# Altium PCB OCB.PcbDoc
Units mil, origin at the board's own origin, x right, y up, seen from the top; angles counter-clockwise.
Board outline 2252.44 x 1567.16 mil, 4 copper layers (Top Layer, Int1 (GND), Int2 (PWR), Bottom Layer), stack 53.912 mil thick; 35 components, 25 nets, 156 pads, 23 vias.
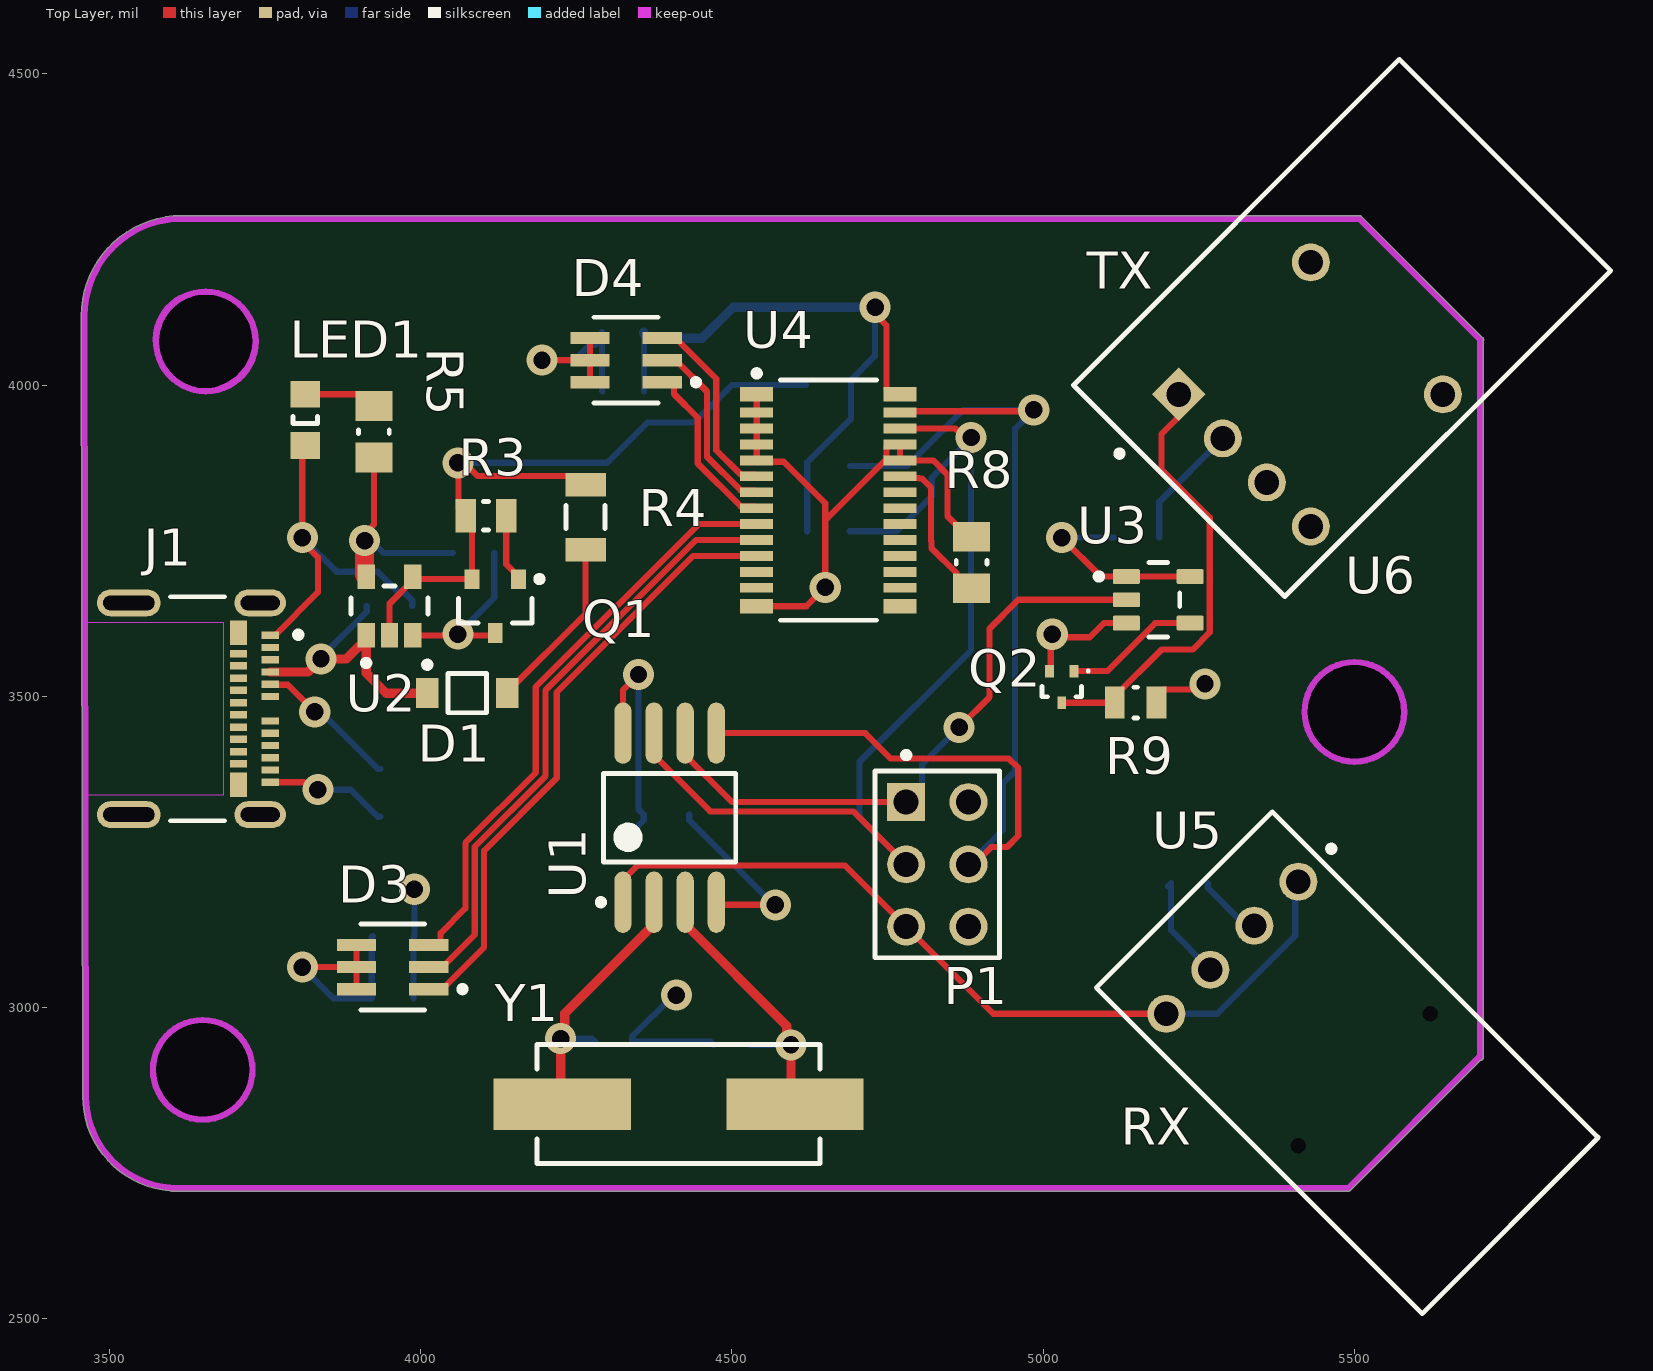
[diagram p0: Top Layer view]
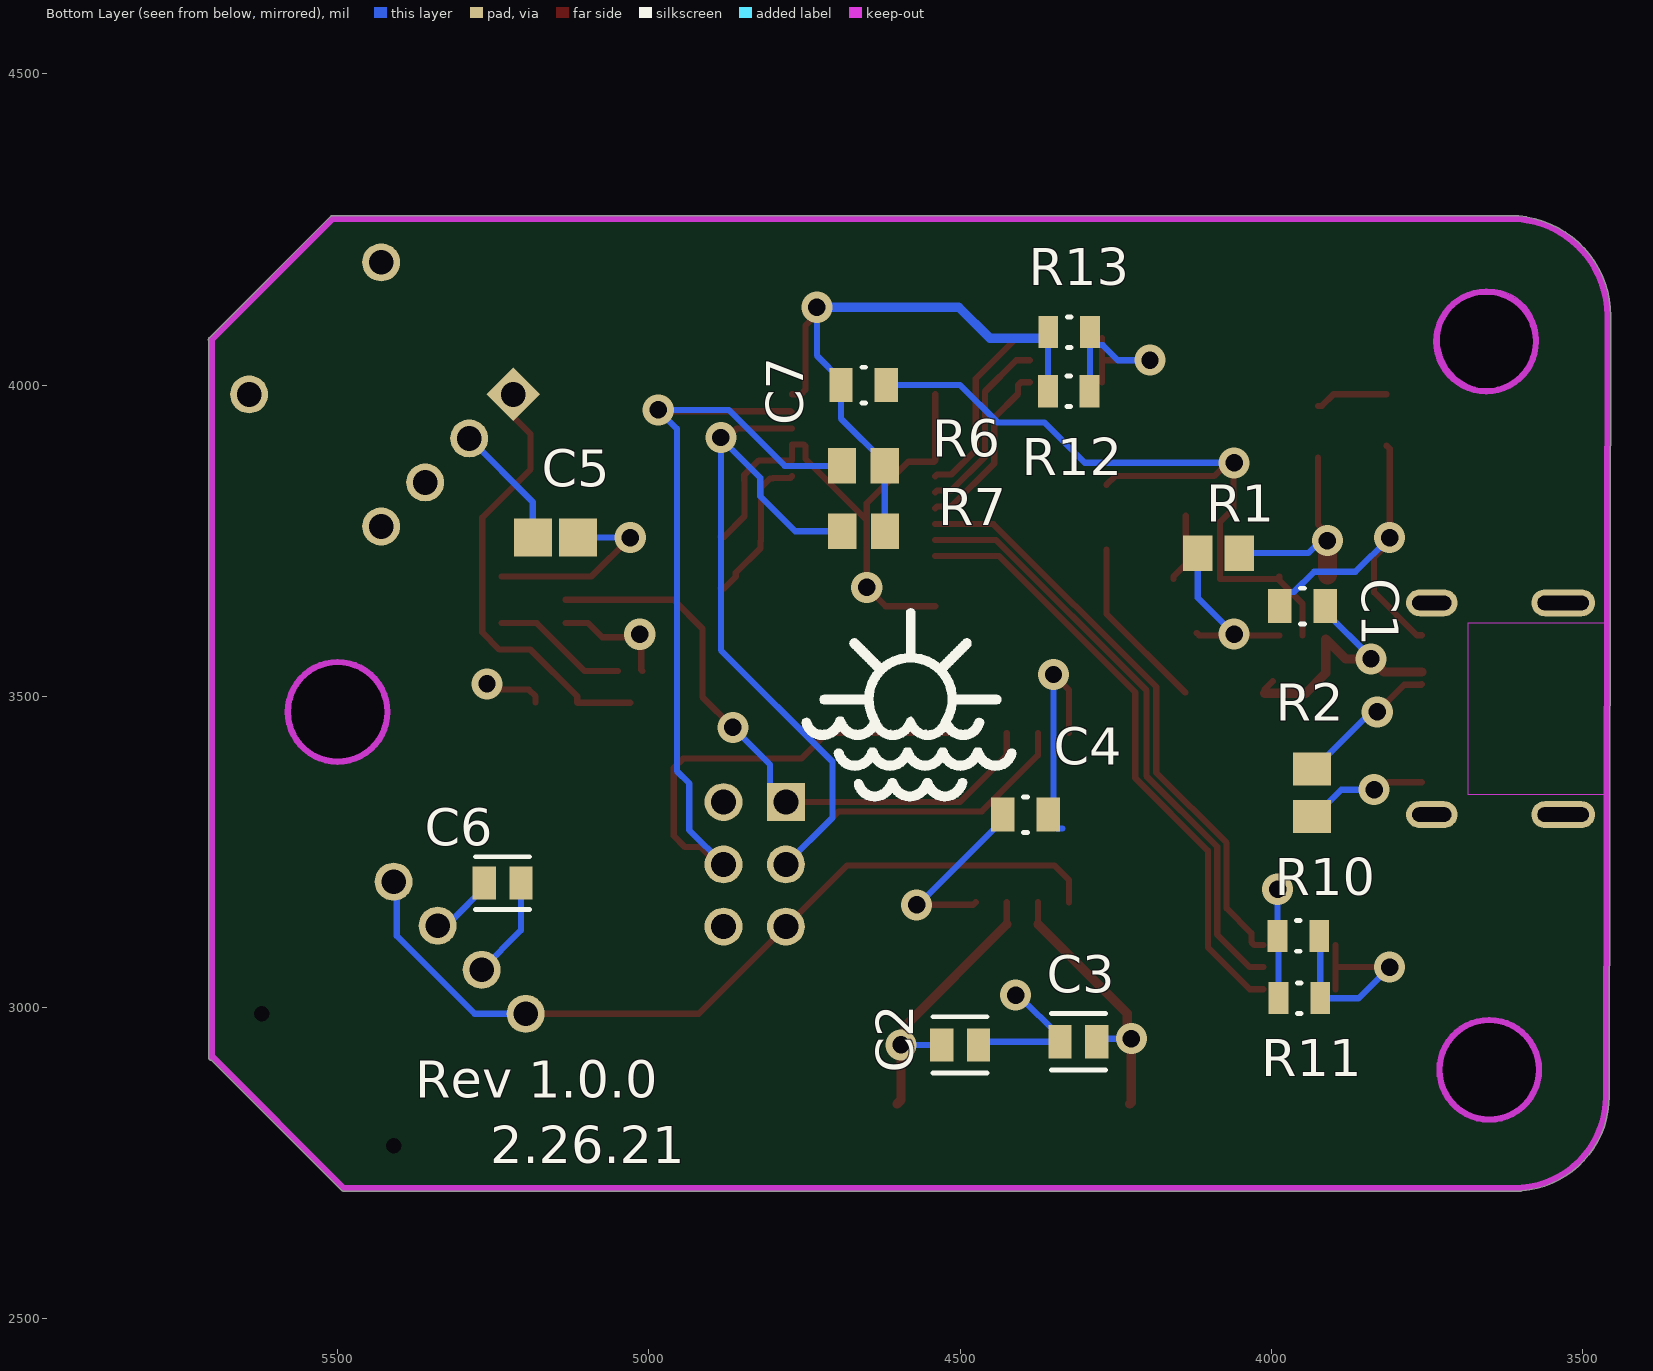
[diagram p1: Bottom Layer view, seen from below]
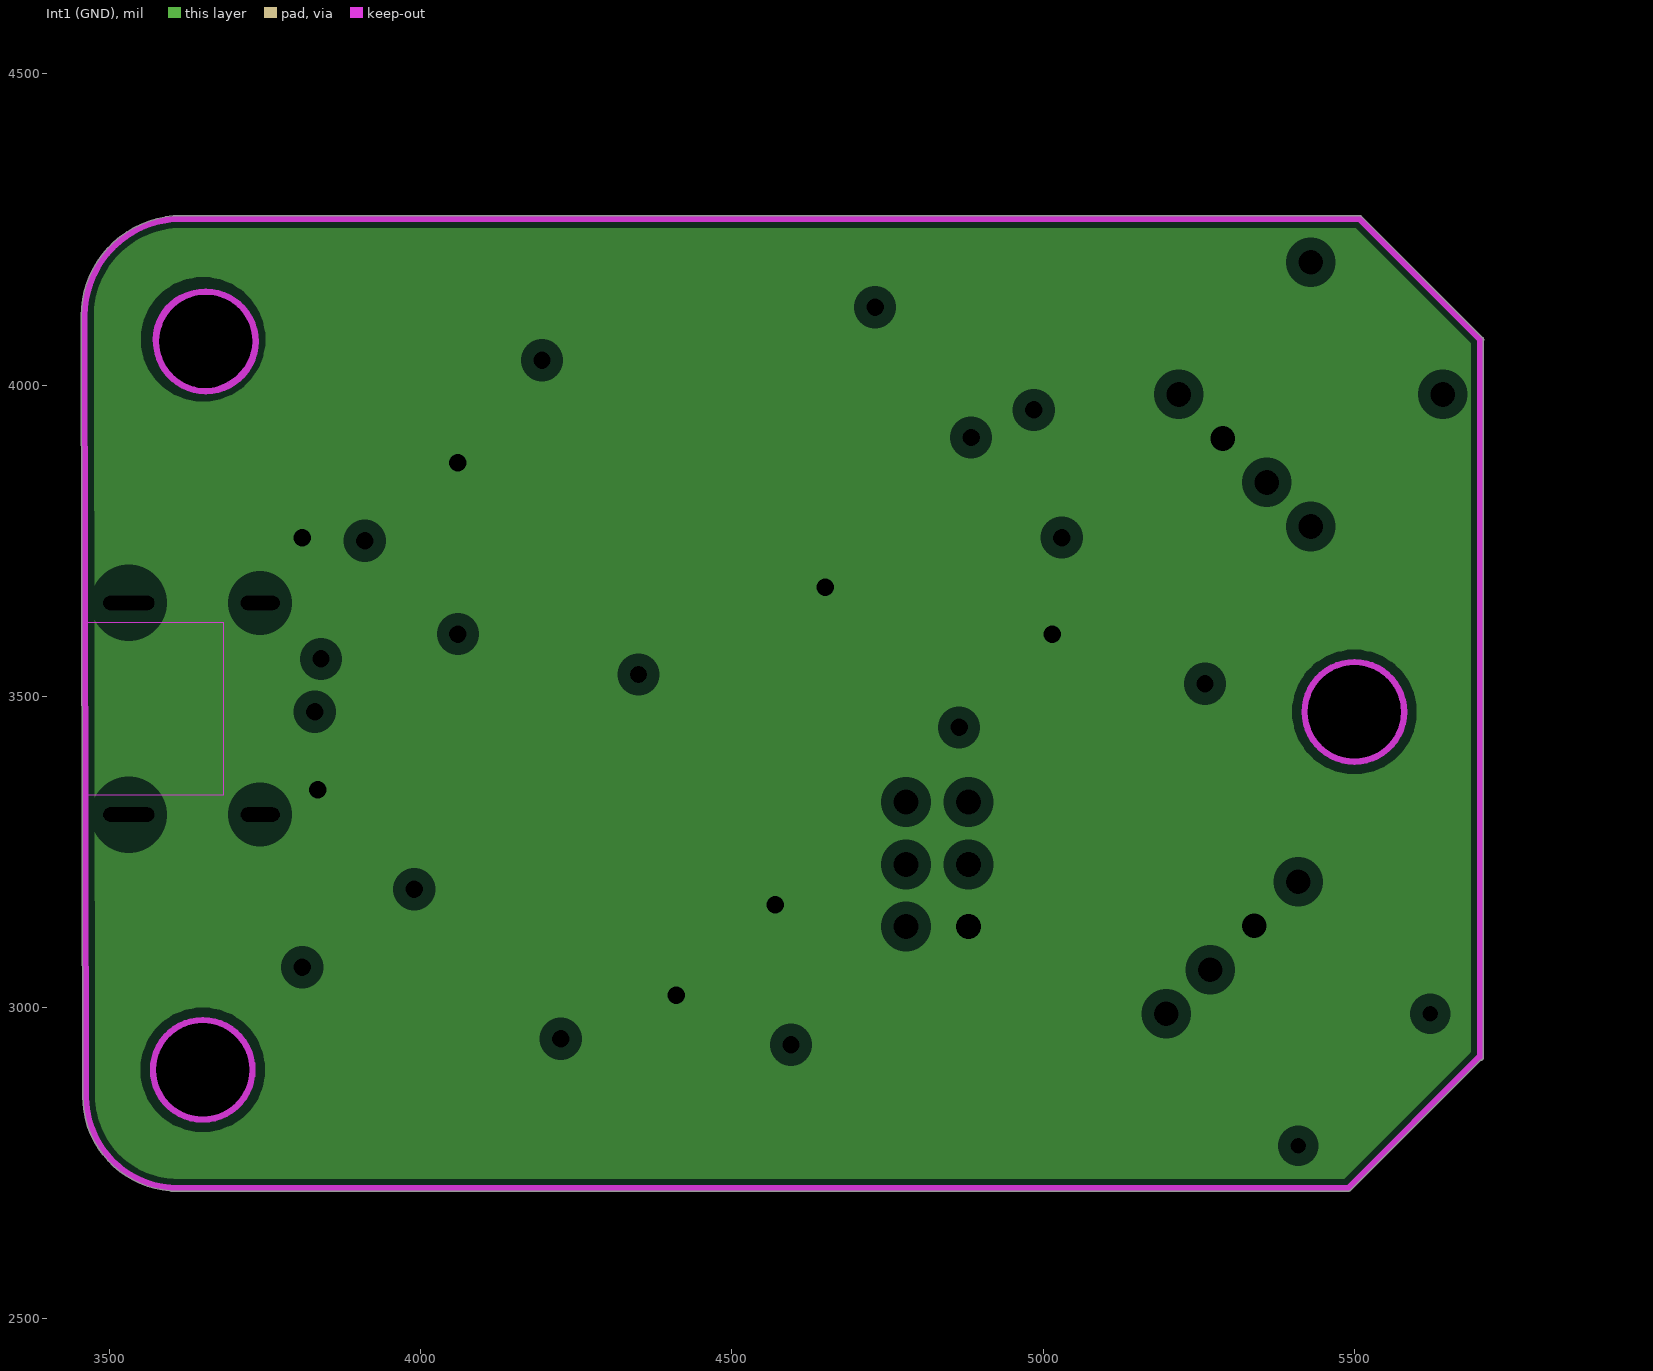
[diagram p2: Int1 (GND), clearances drawn from the general rule]
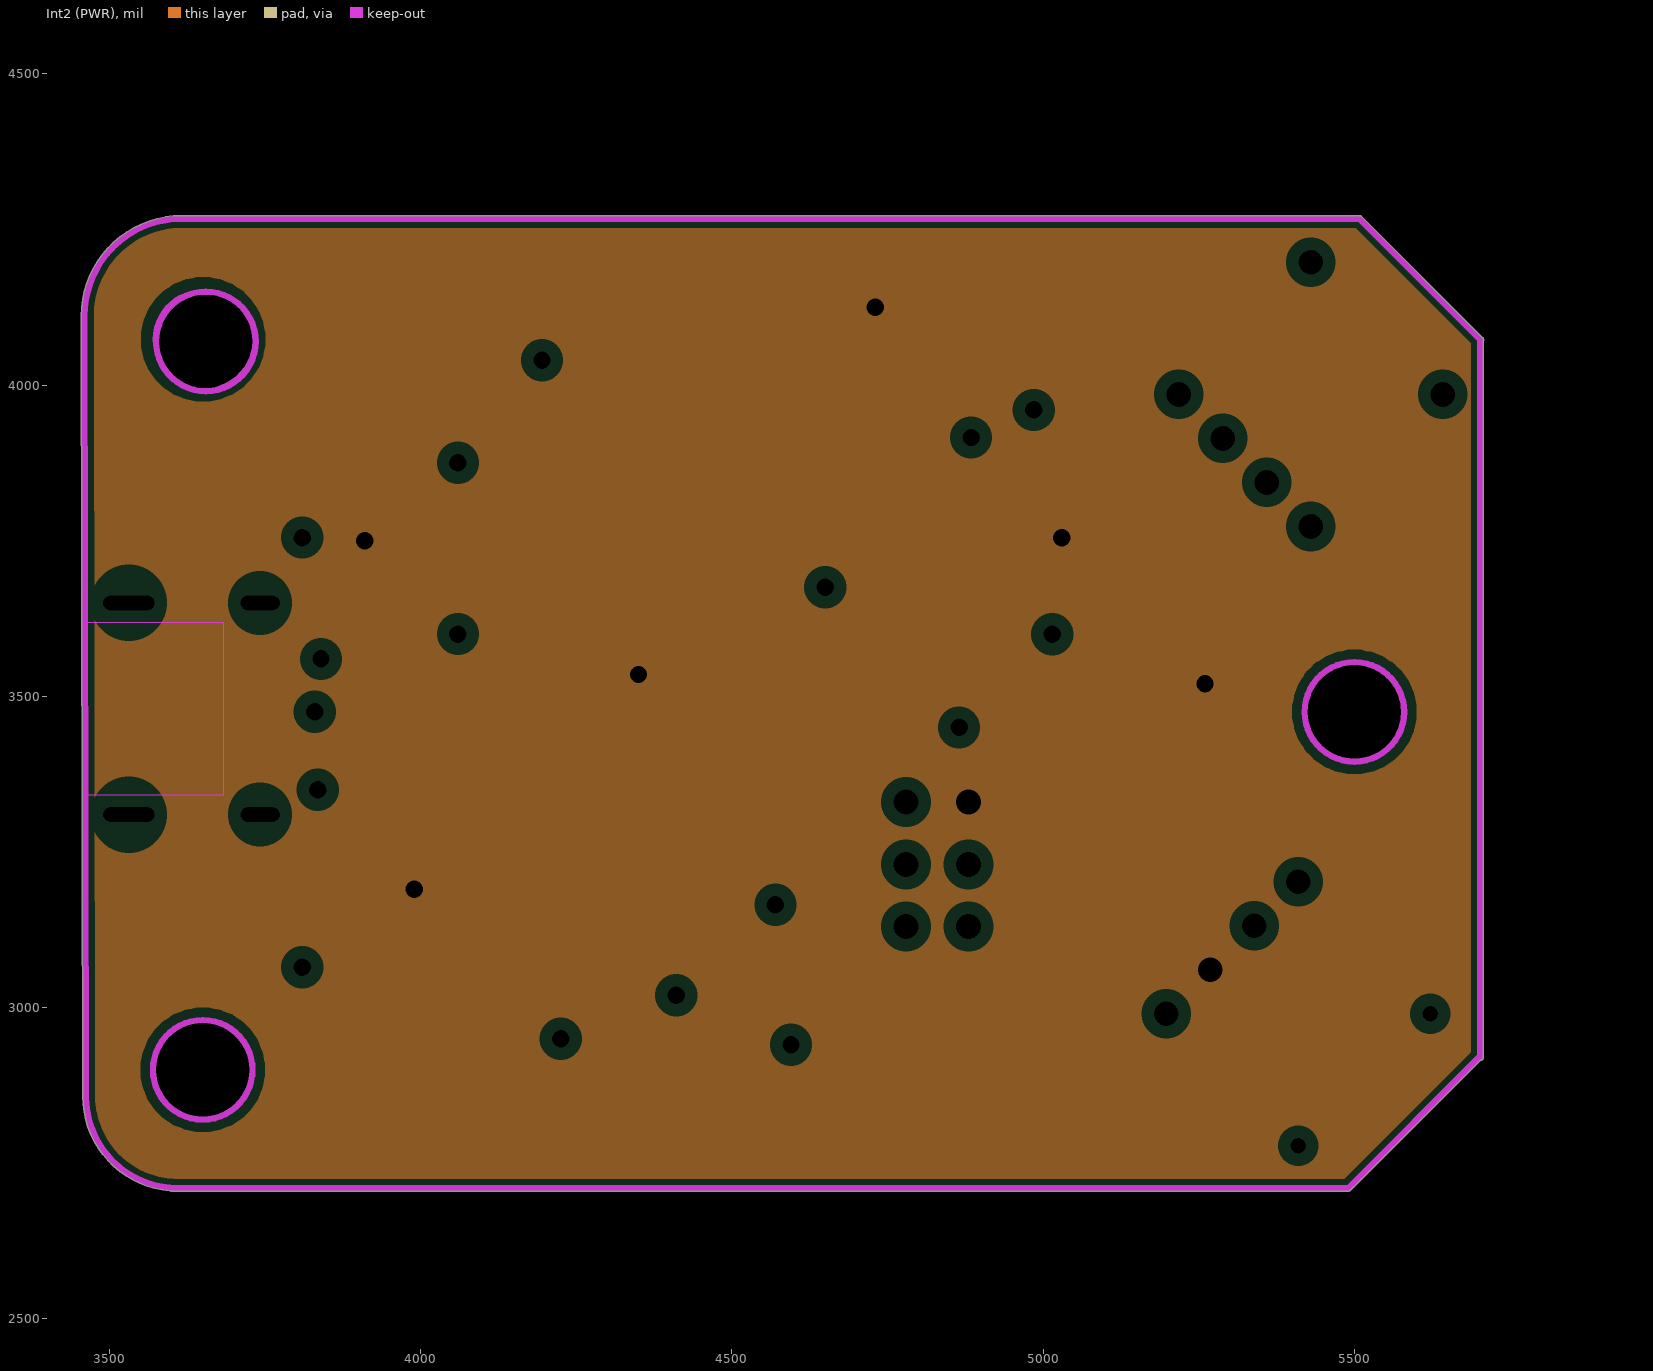
[diagram p3: Int2 (PWR), clearances drawn from the general rule]
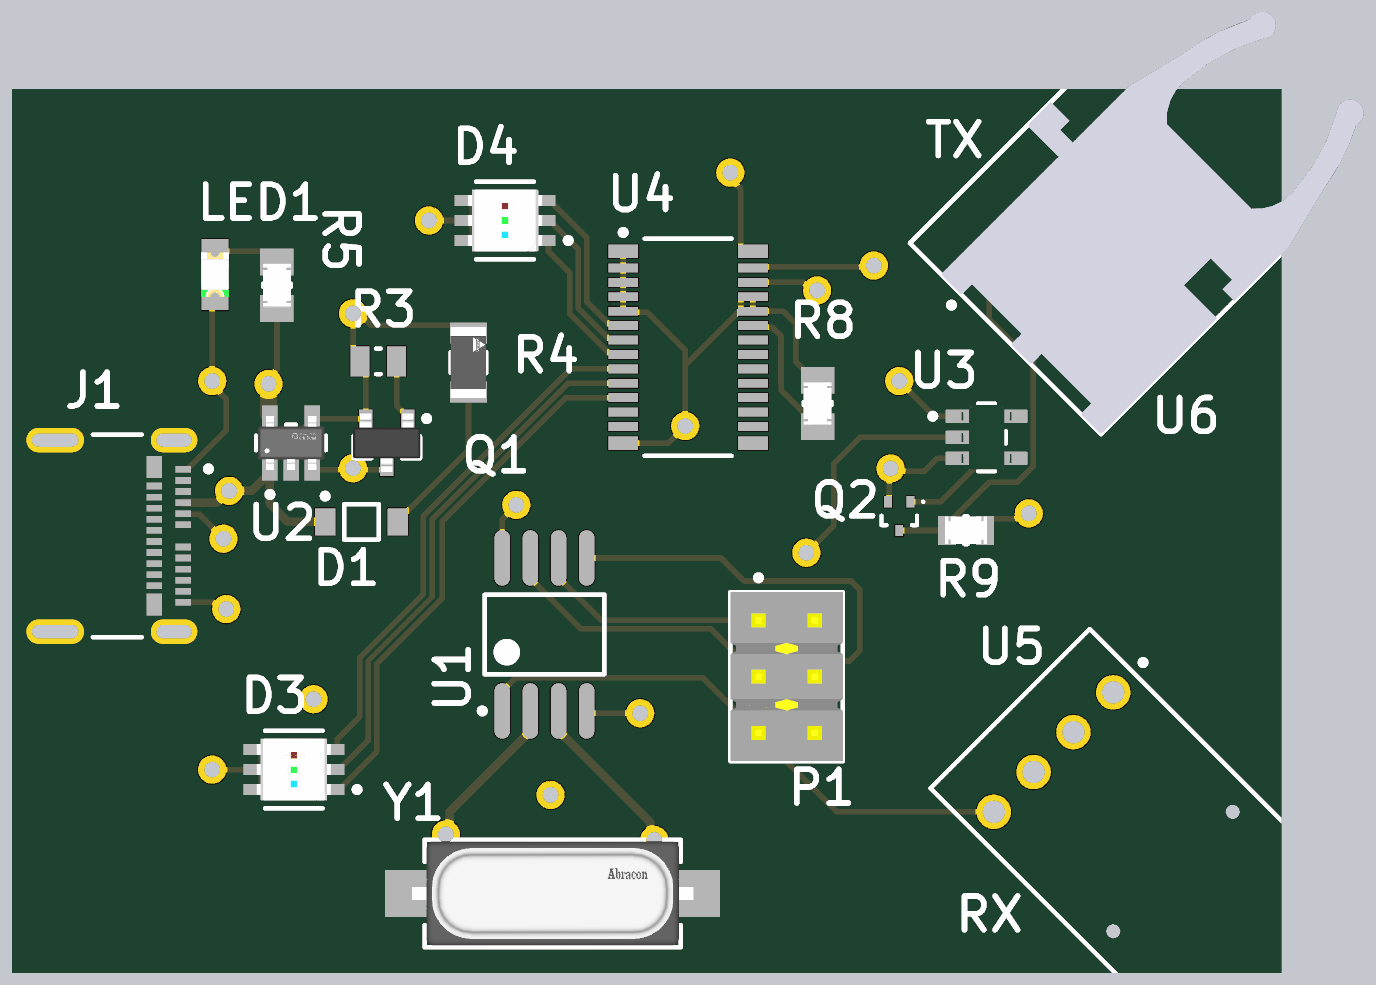
[diagram p4: 3D render of the assembled board from above, using the file's embedded part models]
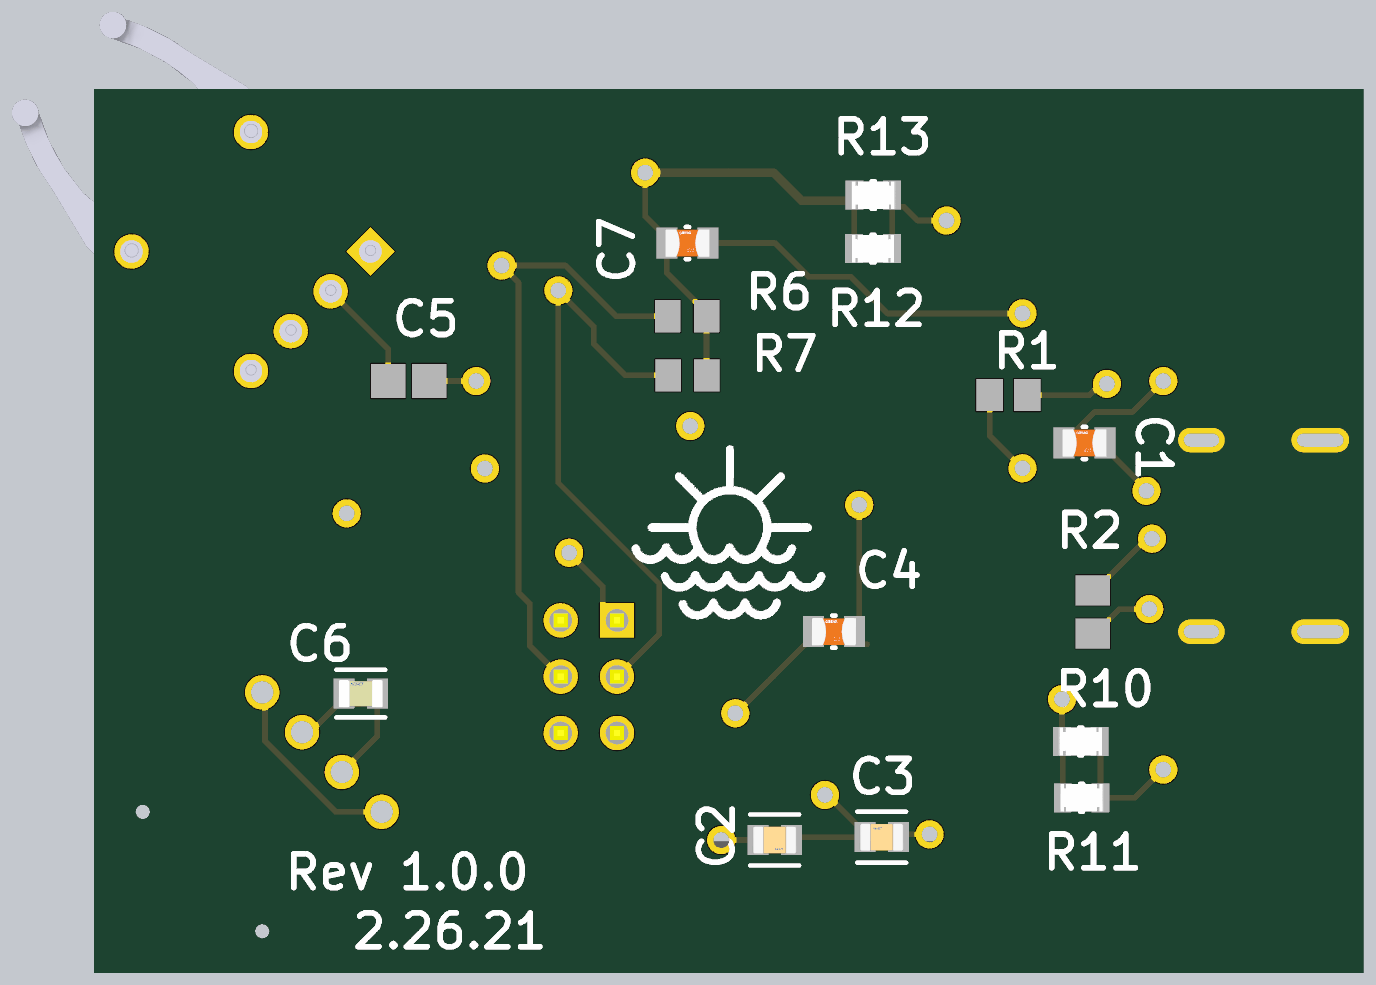
[diagram p5: 3D render of the assembled board from below, using the file's embedded part models]

## Layer stack, top to bottom
Top Solder: solder mask 1, SM-001, Dk 4
Top Layer: signal copper 1.378
Dielectric 1: prepreg 5.1, PP-017, Dk 4.3
Dielectric 2: prepreg 5.1, PP-017, Dk 4.3
Int1 (GND): plane copper 1.378, net GND
Dielectric 3: core 28, Core-039, Dk 4.8
Int2 (PWR): plane copper 1.378, net 3V3
Dielectric 4: prepreg 5.1, PP-017, Dk 4.3
Dielectric 5: prepreg 5.1, PP-017, Dk 4.3
Bottom Layer: signal copper 1.378
Bottom Solder: solder mask 1, SM-001, Dk 4

## Board outline
3597.85,2705.47 ccw(c3600,2710) 3600,2704.99 3610.04,2704.99 5490,2704.99 ccw(c5490,2710) 5493.56,2706.47 5493.55,2706.45 5702.08,2914.99 ccw(c5702.13,2920) 5707.15,2920 5707.15,4070.61 ccw(c5702.5,4072.5) 5707.52,4072.5 ccw(c5702.5,4072.5) 5706.05,4076.05 5511.41,4270.68 5511.43,4270.66 ccw(c5507.87,4267.13) 5507.87,4272.15 5490,4272.15 3616.07,4272.15 ccw(c3616.07,4111.15) 3455.07,4111.15 ccw(c3460.09,4111.15) 3455.07,4111.14 3457.29,2857.68 cw(c3610,2857.69) 3457.29,2857.69 3457.29,2857.68 ccw(c3610,2857.69)
cut-out: 3650.61,3993.46 cw(c3650.61,4073.46) 3570.61,4073.46 cw(c3650.61,4073.46) 3650.61,4153.46 cw(c3650.61,4073.46) 3730.61,4073.46 cw(c3650.61,4073.46)
cut-out: 3570,2900 cw(c3650,2900) 3650,2980 cw(c3650,2900) 3730,2900 cw(c3650,2900) 3650,2820 cw(c3650,2900)
cut-out: 5420,3475 ccw(c5500,3475) 5500,3395 ccw(c5500,3475) 5580,3475 ccw(c5500,3475) 5500,3555 ccw(c5500,3475)

## Design rules (kind name [scope] priority, off if disabled: settings)
Clearance [All] p1: gap=5 ignorepadtopadclearanceinfootprint=FALSE
MinimumSolderMaskSliver [All] p1: minsoldermaskwidth=2
PlaneClearance [All] p1: clearance=20
PlaneConnect [All] p1: planeconnectstyle=Relief reliefexpansion=20 reliefentries=4 reliefconductorwidth=10 reliefairgap=10
PolygonConnect [All] p1: connectstyle=Relief reliefconductorwidth=10 reliefentries=4 polygonreliefangle="90 Angle" airgapwidth=10
RoutingVias [All] p1: holewidth=28 width=50 viastyle="Through Hole" minholewidth=28 minwidth=50 maxholewidth=28 maxwidth=50
SilkToSilkClearance [All] p1: silktosilkclearance=5
SilkToSolderMaskClearance [IsPad] p1: minsilkscreentomaskgap=5 clearancetoexposedcopper=TRUE
SolderMaskExpansion [All] p1: expansion=2 istentingtop=FALSE
UnRoutedNet [All] p1: checkbadconnections=TRUE
Width [All] p1: maxlimit=35 minlimit=10 preferedwidth=10
24 further rules are at their usual default settings.

## Components (designator, comment, footprint, x,y, rotation, side; value= is the part's Value field where it differs from the comment)
C1 "CC0805KRX7R7BB104" FP-CC0805-0_85-MFG 3950,3645 r0 bottom value="100 nF"
C2 "CBR08C240FAGAC" FP-CBR08C-MFG 4500,2940 r0 bottom value="24 pF"
C3 "CBR08C240FAGAC" FP-CBR08C-MFG 4310,2945 r180 bottom value="24 pF"
C4 "CC0805KRX7R7BB104" FP-CC0805-0_85-MFG 4395,3310 r0 bottom value="100 nF"
C5 "08055A4R7CAT2A" CAPC2013X71X50ML20T25 5150,3755 r180 bottom
C6 "C0805C109C5GACTU" FP-C0805C-DN-MFG 5235,3200 r180 bottom value="1.0 pF"
C7 "CC0805KRX7R7BB104" FP-CC0805-0_85-MFG 4655,4000 r0 bottom value="100 nF"
D1 "MMSZ5233BT1G" ONSC-SOD-123-2-425-04_V 4075,3505 r0 top
D3 "ASMT-YTD7-0AA02" FP-PLCC-6-MFG 3955,3065 r180 top
D4 "ASMT-YTD7-0AA02" FP-PLCC-6-MFG 4330,4040 r180 top
J1 "1054500101" FP-1054500101-MFG 3610,3480 r270 top
LED1 "150080SS75000" 0805_A 3815,3943.86 r90 top
P1 "TSW-103-07-G-D" SMTC-TSW-103-07-G-D_V 4830,3230 r270 top
Q1 "2N7002-T1-E3" VISH-TO-236-3_A_L 4120,3645 r270 top
Q2 "MMBT3904TT1G" ONSC-SC-75-3-463-01_V 5030,3515 r270 top
R1 "ERA6AEB332V" RESC2013X60X40NL20T25 4085,3730 r180 bottom
R2 "ERJ6ENF1202V" RESC2013X70X40ML20T20 3935,3345 r270 bottom
R3 "CRCW0805100RFKEA" RESC2013X50X30LL20T20 4105,3790 r0 top
R4 "CRCW1206200RFKEA" FP-CRCW1206-e3-IPC_C 4265,3787.79 r90 top
R5 "CRCW08056K80FKEA" FP-CRCW0805-e3-IPC_A 3925,3925 r270 top
R6 "ERJ-6ENF4701V" RESC2013X70X40NL20T20 4655.55,3870 r180 bottom
R7 "ERJ-6ENF4701V" RESC2013X70X40NL20T20 4655,3765 r180 bottom
R8 "CRCW08056K80FKEA" FP-CRCW0805-e3-IPC_A 4885,3715 r270 top
R9 "CRCW0805160RFKEA" FP-CRCW0805-e3-IPC_C 5148.5,3490 r0 top
R10 "CRCW080510K0JNEA" FP-CRCW0805-e3-IPC_C 3956.5,3115 r0 bottom
R11 "CRCW080510K0JNEA" FP-CRCW0805-e3-IPC_C 3955,3015 r0 bottom
R12 "CRCW080510K0JNEA" FP-CRCW0805-e3-IPC_C 4325.47,3990 r0 bottom
R13 "CRCW080510K0JNEA" FP-CRCW0805-e3-IPC_C 4325,4085 r0 bottom
U1 "ATtiny85-20SU" 8S2_M 4400,3305 r90 top
U2 "NCP114ASN330T1G" FP-483-MFG 3950,3645 r90 top
U3 "SN74LVC1G00DBVR" FP-DBV0005A-MFG 5185,3655 r0 top
U4 "PCA9685PW/Q900,118" SOT361-1_V 4655,3815 r0 top
U5 "HFBR-2521Z" BCM-HFBR-2521Z-4 5410,2990 r45 top
U6 "HFBR-1522Z" AVAG-HFBR-15X2Z_V 5430,3985 r135 top
Y1 "ABLS-16.000MHZ-K4T" FP-ABLS-MFG 4414.53,2845 r0 top

## Footprints (in the part's own frame and the unit in brackets; to place one, negate y for a bottom-side part, rotate by r counter-clockwise, add the part's x,y. Pads: shape width x height; smd on the part's side, far side on the other; paste and mask are expansions set on the pad)
8S2_M [mm] "SOP, 8-Leads, Body 5.3x5.3mm, Pitch 1.27mm, IPC Low Density"
  oval 2.5x0.7 smd: 1(-3.45,1.905) 2(-3.45,0.635) 3(-3.45,-0.635) 4(-3.45,-1.905) 5(3.45,-1.905) 6(3.45,-0.635) 7(3.45,0.635) 8(3.45,1.905)
  silkscreen extent -3.57,-2.7 1.8,2.93, body extent -2.7,-2.68 2.7,2.68, height 2.16
0805_A [mm] "Chip LED, 2-Leads, Body 2.0x1.3mm, IPC Medium Density"
  rect 1.1x1.2 smd: 1(-1.05,0) 2(1.05,0)
  silkscreen extent -0.15,-0.5 0.15,0.5, body extent -1,-0.62 1,0.63, height 0.68
AVAG-HFBR-15X2Z_V [mm] "THD, 6-Leads, Body 18.8x12.19mm, Pitch 2.54mm"
  rect 1.55x1.55 hole 1.01: 1(3.81,3.81)
  round 1.55 hole 1.01: 2(1.27,3.81) 3(-1.27,3.81) 4(-3.81,3.81) 5(-3.81,-3.81) 8(3.81,-3.81)
  silkscreen extent -5.08,-12.22 7.11,7.35, body extent -5.08,-12.22 7.12,6.58, height 7.6
BCM-HFBR-2521Z-4 [mm] "Horizontal Package, 4-Leads, Body 18.8 x 10.16, Height 7.62 mm"
  round 1.55 hole 1.01: 1(3.81,3.81) 2(1.27,3.81) 3(-1.27,3.81) 4(-3.81,3.81)
  round 0 hole 0.64 unplated: 5(-3.81,-3.81) 8(3.81,-3.81)
  silkscreen extent -5.08,-12.22 5.83,6.58, body extent -5.08,-12.22 5.08,6.58, height 7.62
CAPC2013X71X50ML20T25 [mm] "Chip Capacitor, 2-Leads, Body 2.01x1.25mm, IPC Low Density"
  rect 1.55x1.55 smd: 1(-0.925,0) 2(0.925,0)
  body extent -1.1,-0.72 1.11,0.72, height 0.71
FP-483-MFG [mm]
  rect 1x0.7 smd paste+0 mask+0: 1(-1.2,0.95) 2(-1.2,0) 3(-1.2,-0.95) 4(1.2,-0.95) 5(1.2,0.95)
  silkscreen extent -2.45,-1.58 0.82,1.58, body extent -1.8,-1.83 1.8,1.83, height 0.25
FP-1054500101-MFG [mm]
  rrect100% 1.1x2.1 hole 1.6 slot 0.6 at 0 deg paste-1000 mask+0: 1(-4.32,3.36) 2(4.32,3.36)
  rrect100% 1.1x2.6 hole 2.1 slot 0.6 at 0 deg paste-1000 mask+0: 3(-4.32,-2) 4(4.32,-2)
  rect 0.3x0.7 smd paste+0 mask+0: A1(-3,3.77) A2(-2.5,3.77) A3(-2,3.77) A4(-1.5,3.77) A5(-1,3.77) A6(-0.5,3.77) A7(0.5,3.77) A8(1,3.77) A9(1.5,3.77) A10(2,3.77) A11(2.5,3.77) A12(3,3.77) B2(2.25,2.47) B3(1.75,2.47) B4(1.25,2.47) B5(0.75,2.47) B6(0.25,2.47) B7(-0.25,2.47) B8(-0.75,2.47) B9(-1.25,2.47) B10(-1.75,2.47) B11(-2.25,2.47)
  rect 1x0.7 smd paste+0 mask+0: B1(3.1,2.47) B12(-3.1,2.47)
  Keep-Out Layer region: -3.5,-3.77 3.5,-3.77 3.5,1.88 -3.5,1.88
  silkscreen extent -4.57,-0.3 4.57,5.04
FP-ABLS-MFG [mm]
  rect 5.6x2.1 smd paste+0 mask+0: 1(-4.75,0) 2(4.75,0)
  silkscreen extent -5.77,-2.42 5.77,2.42, body extent -7.65,-2.52 7.65,2.52, height 0.25
FP-C0805C-DN-MFG [mm]
  rect 0.95x1.35 smd paste+0 mask+0: 1(-0.75,0) 2(0.75,0)
  silkscreen extent -1.1,-1.07 1.1,1.07, body extent -1,-0.63 1,0.62, height 0.88
FP-CBR08C-MFG [mm]
  rect 0.95x1.35 smd paste+0 mask+0: 1(-0.75,0) 2(0.75,0)
  silkscreen extent -1.1,-1.15 1.1,1.15, body extent -1,-0.63 1,0.62, height 0.95
FP-CC0805-0_85-MFG [mm]
  rect 0.95x1.4 smd paste+0 mask+0: 1(-0.925,0) 2(0.925,0)
  silkscreen extent -0.08,-0.72 0.08,0.72, body extent -1,-0.63 1,0.63, height 0.95
FP-CRCW0805-e3-IPC_A [mil]
  rect 47.5x59.38 smd paste+0 mask+0: 1(-41.37,0) 2(41.37,0)
  silkscreen extent -3,-25 3,25, body extent -85,-49 85,49, height 10
FP-CRCW0805-e3-IPC_C [mil]
  rect 31.75x51.5 smd paste+0 mask+0: 1(-33.5,0) 2(33.5,0)
  silkscreen extent -3,-25 3,25, body extent -53,-31 53,31, height 10
FP-CRCW1206-e3-IPC_C [mil]
  rect 37.64x65.28 smd paste+0 mask+0: 1(-52.21,0) 2(52.21,0)
  silkscreen extent -19,-31 19,31, body extent -75,-38 75,38, height 10
FP-DBV0005A-MFG [mm]
  rrect17% 1.1x0.6 smd paste+0 mask+0: 1(-1.3,0.95) 2(-1.3,0) 3(-1.3,-0.95) 4(1.3,-0.95) 5(1.3,0.95)
  silkscreen extent -2.55,-1.53 0.87,1.52, body extent -1.95,-1.78 1.95,1.78, height 0.25
FP-PLCC-6-MFG [mm]
  rect 1.6x0.5 smd paste+0 mask+0: 1(-1.475,0.9) 2(-1.475,0) 3(-1.475,-0.9) 4(1.475,-0.9) 5(1.475,0) 6(1.475,0.9)
  silkscreen extent -2.98,-1.75 1.3,1.75, body extent -2.37,-1.6 2.37,1.6, height 0.25
ONSC-SC-75-3-463-01_V [mil] "SOT23, 3-Leads, Body 1.6x0.8mm, Pitch 0.5mm"
  rect 20x14.02 smd: 1(-25.49,19.69) 2(-25.49,-19.69) 3(25.49,0)
  silkscreen extent -27,-31 16,44, body extent -16,-31 16,31, height 35
ONSC-SOD-123-2-425-04_V [mm] "SOD, 2-Leads, Body 2.69x1.6mm"
  rect 0.91x1.22 smd: 1(-1.635,0) 2(1.635,0)
  silkscreen extent -1.76,-0.8 0.78,1.28, body extent -1.35,-0.8 1.35,0.8, height 1.35
RESC2013X50X30LL20T20 [mm] "Chip Resistor, 2-Leads, Body 2.00x1.25mm, IPC High Density"
  rect 0.85x1.35 smd: 1(-0.825,0) 2(0.825,0)
  silkscreen extent -0.1,-0.58 0.1,0.58, body extent -1.1,-0.72 1.1,0.72, height 0.5
RESC2013X60X40NL20T25 [mm] "Chip Resistor, 2-Leads, Body 2.00x1.25mm, IPC Medium Density"
  rect 1.2x1.45 smd: 1(-0.85,0) 2(0.85,0)
  body extent -1.1,-0.72 1.1,0.72, height 0.6
RESC2013X70X40ML20T20 [mm] "Chip Resistor, 2-Leads, Body 2.00x1.25mm, IPC Low Density"
  rect 1.35x1.55 smd: 1(-0.975,0) 2(0.975,0)
  body extent -1.1,-0.72 1.1,0.72, height 0.7
RESC2013X70X40NL20T20 [mm] "Chip Resistor, 2-Leads, Body 2.2x1.35mm, IPC Medium Density"
  rect 1.15x1.45 smd: 1(-0.875,0) 2(0.875,0)
  body extent -1.1,-0.72 1.1,0.72, height 0.7
SMTC-TSW-103-07-G-D_V [mm] "THD, 6-Leads, Body 7.62x5.08mm, Pitch 2.54mm"
  rect 1.55x1.55 hole 1.02: 1(-2.54,-1.27)
  round 1.55 hole 1.02: 2(-2.54,1.27) 3(0,-1.27) 4(0,1.27) 5(2.54,-1.27) 6(2.54,1.27)
  silkscreen extent -4.58,-2.54 3.81,2.54, body extent -3.81,-2.54 3.81,2.54, height 8.38
SOT361-1_V [mm] "SOP, 28-Leads, Body 9.7x4.4mm, Pitch 0.65mm, NXP Recommended"
  rect 1.35x0.6 smd: 1(-2.925,4.325) 14(-2.925,-4.325) 15(2.925,-4.325) 28(2.925,4.325)
  rect 1.35x0.4 smd: 2(-2.925,3.575) 3(-2.925,2.925) 4(-2.925,2.275) 5(-2.925,1.625) 6(-2.925,0.975) 7(-2.925,0.325) 8(-2.925,-0.325) 9(-2.925,-0.975) 10(-2.925,-1.625) 11(-2.925,-2.275) 12(-2.925,-2.925) 13(-2.925,-3.575) 16(2.925,-3.575) 17(2.925,-2.925) 18(2.925,-2.275) 19(2.925,-1.625) 20(2.925,-0.975) 21(2.925,-0.325) 22(2.925,0.325) 23(2.925,0.975) 24(2.925,1.625) 25(2.925,2.275) 26(2.925,2.925) 27(2.925,3.575)
  silkscreen extent -3.05,-4.9 1.96,5.3, body extent -2.2,-4.85 2.2,4.85, height 1.1
VISH-TO-236-3_A_L [mm] "SOT-23, 3-Leads, Body 3.04x1.4mm, Pitch 0.95mm, IPC High Density"
  rect 0.8x0.6 smd: 1(-1.1,0.95) 2(-1.1,-0.95) 3(1.1,0)
  silkscreen extent -1.22,-1.5 0.7,1.93, body extent -1.32,-1.52 1.32,1.52, height 1.12

## Part data
C1 C4 C7: library part CMP-1036-04402-6, "CAP CER 0.1UF 16V X7R 0805", Capacitance="100 nF", Manufacturer=Yageo, Package=CC0805-0.85, Temperature="-30°C to +85°C", Temperature Characteristic=X7R, Temperature Range High=+85°C, Temperature Range Low=-30°C, Tolerance=0.1, Voltage Rating="16 V", Automotive=No, Category=Cap, ComponentLink2Description=Datasheet, ComponentLink2URL=http://www.yageo.com/documents/recent/UPY-GPHC_Y5V_6.3V-to-50V_8.pdf, Device Class L1="Passive Components", Device Class L2=Capacitors, Device Class L3="Ceramic Capacitors", Digikey Description="CAP CER 0.1UF 16V X7R 0805", Footprint Url=http://www.yageo.com/exep/pages/download/literatures/UPY-C_GEN_24.pdf, Height=0.95mm, Ipc Land Pattern Name=CAPC200125X85, Lead Free=Yes, Manufacturer Part Number=CC0805KRX7R7BB104, Material=Ceramic, Mouser Description="Multilayer Ceramic Capacitors MLCC - SMD/SMT 100nF 16V X7R 10%", Octopart=https://octopart.com/cc0805krx7r7bb104-yageo-39467769, RoHS=TRUE
C2 C3: library part CMP-03020-025790-1, "CAP CER 24PF 250V C0G/NP0 0805", Capacitance="24 pF", Manufacturer=KEMET, Package=CBR08C, Temperature="-55°C to +125°C", Temperature Characteristic=C0G, Temperature Coefficient=30ppm/°C, Temperature Range High=+125°C, Temperature Range Low=-55°C, Tolerance=0.01, Voltage Rating="250 V", Automotive=No, Category=Cap, ComponentLink2Description=Datasheet, ComponentLink2URL=https://content.kemet.com/datasheets/KEM_C1030_CBR_SMD.pdf, Device Class L1="Passive Components", Device Class L2=Capacitors, Device Class L3="Ceramic Capacitors", Digikey Description="CAP CER 24PF 250V C0G/NP0 0805", Height=0.95mm, Ipc Land Pattern Name=CAPC200125X85, Lead Free=Yes, Manufacturer Part Number=CBR08C240FAGAC, Material=Ceramic, Octopart=https://octopart.com/cbr08c240fagac-kemet-23843296, RoHS=TRUE
C5: library part CMP-1036-00549-2, Manufacturer="AVX Interconnect / Elco", Part Number=08055A4R7CAT2A
C6: library part CMP-2007-00453-2, "CAP CER 1PF 50V C0G/NP0 0805", Capacitance="1.0 pF", Manufacturer=KEMET, Package=C0805C-DN, Temperature="-55°C to +125°C", Temperature Characteristic=C0G, Temperature Coefficient=30ppm/°C, Temperature Range High=+125°C, Temperature Range Low=-55°C, Tolerance="0.25 pF", Voltage Rating="50 V", Automotive=No, Category=Cap, ComponentLink2Description=Datasheet, ComponentLink2URL=https://content.kemet.com/datasheets/KEM_C1003_C0G_SMD.pdf, Device Class L1="Passive Components", Device Class L2=Capacitors, Device Class L3="Ceramic Capacitors", Digikey Description="CAP CER 1PF 50V C0G/NP0 0805", Height=0.88mm, Ipc Land Pattern Name=CAPC200125X78, Lead Free=Yes, Manufacturer Part Number=C0805C109C5GACTU, Material=Ceramic, Mouser Description="Multilayer Ceramic Capacitors MLCC - SMD/SMT 50volts 1.0pF C0G 0.25%", Octopart=https://octopart.com/c0805c109c5gactu-kemet-130858, RoHS=TRUE
D1: library part CMP-1060-00590-1, "Zener Voltage Regulator, 500 mW, 2-Pin SOD-123, Pb-Free, Tape and Reel", Manufacturer="On Semiconductor", ComponentLink1Description="Manufacturer URL", ComponentLink1URL=http://www.onsemi.com/, ComponentLink2Description=Datasheet, ComponentLink2URL=http://www.onsemi.com/pub_link/Collateral/MMSZ5221BT1-D.PDF, ComponentLink3Description="Package Specification", ComponentLink3URL=http://www.onsemi.com/pub_link/Collateral/425-04.PDF, DatasheetVersion="Rev. 12", Mounting Technology="Surface Mount", P Max (W)=0.5, PackageDescription="2-Pin SOD, Body 1.6 x 2.69 mm", PackageReference=SOD-123-2-425-04, PackageVersion="Rev. G, 10/2009", Packing="Tape and Reel", PartNumber=MMSZ5233BT1G, RoHS=Pb-Free, VZ Typ (V)=6.0
D3 D4: library part CMP-18399-000005-1, "LED RGB DIFFUSED 6PLCC SMD", Colour="Red, Green, Blue", Forward Current=20mA, Forward Voltage=2.1/3.1/3.1V, Manufacturer=Broadcom, Max Junction Temp=+110°C, Package=PLCC-6, Power Dissipation=125/90/90mW, Reverse Voltage=4V, Temperature="-40°C to +100°C", Temperature Range High=+100°C, Temperature Range Low=-40°C, Automotive=No, Category=Diode, ComponentLink2Description=Datasheet, ComponentLink2URL=https://docs.broadcom.com/doc/AV02-3873EN, Device Class L1=Optoelectronics, Device Class L2=LEDs, Device Class L3=unset, Digikey Description="LED RGB DIFFUSED 6PLCC SMD", Height=2mm, Lead Free=Yes, Led Orientation="Top View", Luminous Intensity=650/1900/384mcd, Manufacturer Part Number=ASMT-YTD7-0AA02, Mouser Description="Standard LEDs - SMD PLCC6,T/MT SILICONE RGB", Octopart=https://octopart.com/asmt-ytd7-0aa02-broadcom-71127359, Peak Emmision Wavelength=630/522/465nm, RoHS=TRUE, Viewing Angle=120°, Wavelength=623/529/469nm
J1: library part CMP-04767-000004-1, "CONN RCP USB3.1 TYPEC 24P SMD RA", Current Rating=0.25/1.25/5A, Manufacturer=Molex, Package=0, Temperature="-30°C to +85°C", Temperature Range High=+85°C, Temperature Range Low=-30°C, Voltage Rating=30V, Automotive=No, Category=Conn, ComponentLink2Description=Datasheet, ComponentLink2URL=https://www.molex.com/webdocs/datasheets/pdf/en-us/1054500101_IO_CONNECTORS.pdf, Conn Orientation="Right Angle", Contact Material=Gold,Nickel, Device Class L1=Connectors, Device Class L2="USB Connectors", Device Class L3=unset, Digikey Description="CONN RCP USB3.1 TYPEC 24P SMD RA", Footprint Url=https://www.molex.com/pdm_docs/sd/1054500101_sd.pdf, Height=3.44mm, Is Female=yes, Lead Free=Yes, Manufacturer Part Number=1054500101, Mouser Description="USB Shielded I/O Receptacle; Type C; Right Angle; Surface Mount; Gold over Nickel", Number Of Contacts=24, Octopart=https://octopart.com/105450-0101-molex-68082325, Pitch=0.5mm, RoHS=TRUE, Shielding=true, Usb Standard="USB 3.1"
LED1: library part CMP-1426-00010-1, "SMD mono-color Chip LED, WL-SMCW, Super Red", Color="Super Red", Manufacturer="Wuerth Elektronik", ComponentLink1Description="Manufacturer URL", ComponentLink1URL=http://www.we-online.com, ComponentLink2Description=Datasheet, ComponentLink2URL=http://katalog.we-online.com/led/datasheet/150080SS75000.pdf, PackageReference=0805_A, PartNumber=150080SS75000
P1: library part CMP-2000-07329-1, "Through Hole Header, Pitch 2.54 mm, 2 x 3 Position, Height 8.58 mm, Tail Length 2.54 mm, -55 to 125 degC, RoHS, Bulk", Color=Black, Manufacturer=Samtec-Inc., Package Description="Through Hole Header, Pitch 2.54 mm, 2 x 3 Position, Height 8.58 mm, Tail Length 2.54 mm", Category=Connectors,Interconnects, Connector Type=Header,Unshrouded, Contact Finish=Gold, Contact Finish Thickness=10µin(0.25µm), Contact Mating Length="0.230\"(5.84mm)", Contact Type=MalePin, Datasheet URL=http://suddendocs.samtec.com/catalog_english/tsw_th.pdf, Datasheet Version=12/2015, Family=RectangularConnectors-Headers,MalePins, Fastening Type=-, Features=-, Manufacturer URL=http://www.samtec.com/, Mounting Technology=ThroughHole, Mounting Type=ThroughHole, Number of Positions=6, Number of Positions Loaded=All, Number of Rows=2, Package Reference=TSW-103-07-G-D, Package URL=http://suddendocs.samtec.com/prints/tsw-xxx-xx-xxx-x-xx-xxx-mkt.pdf, Packaging=Bulk, Pitch="0.100\"(2.54mm)", Row Spacing="0.100\"(2.54mm)", Series=TSW, Termination=Solder
Q1: library part CMP-2000-05565-1, "N-Channel MOSFET, 115 mA, 60 V, -55 to 150 degC, 3-Pin SOT23, RoHS, Tape and Reel", Continuous Drain Current Id=115mA, Drain Source Voltage Vds=60V, Manufacturer=Vishay, On Resistance Rds(on)=7.5ohm, Operating Temperature Max=150°C, Package Description="3-Pin Small Outline Transistor, Body 2.92 x 1.3 mm, Pitch 0.95 mm", Package Reference=TO-236-3, Power Dissipation Pd=200mW, Rds(on) Test Voltage Vgs=10V, Threshold Voltage Vgs=2.1V, Transistor Case Style=TO-236, Datasheet URL=http://www.vishay.com/docs/70226/70226.pdf, Datasheet Version="Rev. F, 07/2001", Manufacturer URL=http://www.vishay.com/, Mounting Technology=SurfaceMount, MSL=MSL1-Unlimited, No. of Pins=3, Package URL=http://www.vishay.com/docs/71196/71196.pdf, SVHC=NoSVHC(17-Dec-2014), Transistor Polarity=NChannel
Q2: library part CMP-1048-00420-1, "General Purpose Transistor, NPN Silicon, 3-Pin SC-75, Pb-Free, Tape and Reel", Manufacturer="On Semiconductor", ComponentLink1Description="Manufacturer URL", ComponentLink1URL=http://www.onsemi.com/, ComponentLink2Description=Datasheet, ComponentLink2URL=http://www.onsemi.cn/pub_link/Collateral/MMBT3904TT1-D.PDF, ComponentLink3Description="Package Specification", ComponentLink3URL=http://www.onsemi.com/pub_link/Collateral/463-01.PDF, DatasheetVersion="Rev. 5", fT Min (MHz)=300, IC Continuous (A)=0.2, Mounting Technology="Surface Mount", PackageDescription="3-Pin Small Outline Transistor, Body 1.6 x 0.8 mm, Pitch 0.5 mm", PackageReference=SC-75-3-463-01, PackageVersion="Rev. F, 07/2005", Packing="Tape and Reel", PartNumber=MMBT3904TT1G, Polarity=NPN, RoHS=TRUE
R1: library part CMP-2001-00629-1, Manufacturer=Panasonic, Part Number=ERA6AEB332V
R2: library part CMP-2001-00513-1, Manufacturer=Panasonic, Part Number=ERJ6ENF1202V
R3: library part CMP-2001-04901-1, Manufacturer="Vishay Dale", Part Number=CRCW0805100RFKEA
R4: library part CMP-2003-01935-2, "RES Thick Film, 200Ω, 1%, 0.25W, 100ppm/°C, 1206", Case Code (Imperial)=1206, Case Code (Metric)=3216, Max Operating Temperature=155°C, Max Power Dissipation=250mW, Min Operating Temperature=-55°C, Package Quantity=10, Resistance=200R, Temperature Coefficient=100ppm/°C, Tolerance=1%, Voltage Rating=200V, Case/Package=1206, Composition="Thick Film", Contact Plating=Tin, Depth=1.6mm, Features="Automotive AEC-Q200", Height=0.55mm, Lead Free="Lead Free", Length=3.2mm, Military Standard=Not, Number of Pins=2, Number of Terminations=2, Packaging="Tape and Reel", Power Rating=250mW, Radiation Hardening=No, Termination=SMD/SMT, Voltage Rating (DC)=200V, Weight=0.000353oz, Width=1.6mm, Working Voltage=200V
R5 R8: library part CMP-2001-04088-2, "RES Thick Film, 6.8kΩ, 1%, 0.125W, 100ppm/°C, 0805", Case Code (Imperial)=0805, Case Code (Metric)=2012, Max Operating Temperature=155°C, Max Power Dissipation=125mW, Min Operating Temperature=-55°C, Package Quantity=10, Resistance=6.8kR, Temperature Coefficient=100ppm/°C, Tolerance=1%, Voltage Rating=150V, Case/Package=0805, Composition="Thick Film", Contact Plating=Tin, Depth=1.25mm, Features="Automotive AEC-Q200", Height=0.45mm, Lead Free="Lead Free", Length=2mm, Military Standard=Not, Mount="Surface Mount", Number of Terminations=2, Packaging="Tape and Reel", Power Rating=125mW, Radiation Hardening=No, Termination=SMD/SMT, Voltage Rating (DC)=150V, Weight=0.000194oz, Width=0.049inch
R6 R7: library part CMP-2001-00550-5, "Chip Resistor, 4.7 KOhm, +/- 1%, 0.125 W, -55 to 155 degC, 0805 (2012 Metric), RoHS, Tape and Reel", Manufacturer=Panasonic, Max Operating Temperature="155 degC", Min Operating Temperature="-55 degC", Package Quantity=5000, Voltage Rating="150 V", ComponentLink1Description="Manufacturer URL", ComponentLink1URL=http://www.panasonic.com/, ComponentLink2Description=Datasheet, ComponentLink2URL=http://industrial.panasonic.com/cdbs/www-data/pdf/RDA0000/AOA0000C86.pdf, DatasheetVersion=04/2015, Height="0.6 mm", Length="2 mm", Mount="Surface Mount", Mounting Technology="Surface Mount", PackageDescription="2-Pin Surface Mount Device, Body 2 x 1.25 mm", PackageReference=0805, Packaging="Tape and Reel", Pins=2, REACH SVHC=Yes, RoHSCompliant=true
R9: library part CMP-1013-00418-2, "RES Thick Film, 160Ω, 1%, 0.125W, 100ppm/°C, 0805", Case Code (Imperial)=0805, Case Code (Metric)=2012, Max Operating Temperature=155°C, Max Power Dissipation=125mW, Min Operating Temperature=-55°C, Package Quantity=10, Resistance=160R, Temperature Coefficient=100ppm/°C, Tolerance=1%, Voltage Rating=150V, Case/Package=0805, Composition="Thick Film", Depth=1.25mm, Features="Automotive AEC-Q200", Height=0.02inch, Lead Free="Lead Free", Length=2mm, Military Standard=Not, Number of Pins=2, Number of Terminations=2, Packaging="Tape and Reel", Power Rating=125mW, Termination=SMD/SMT, Voltage Rating (DC)=150V, Weight=0.000194oz, Width=0.049inch
R10 R11 R12 R13: library part CMP-2001-04910-2, "RES Thick Film, 10kΩ, 5%, 0.125W, 200ppm/°C, 0805", Case Code (Imperial)=0805, Case Code (Metric)=2012, Max Operating Temperature=155°C, Min Operating Temperature=-55°C, Package Quantity=5000, Power Rating=125mW, Resistance=10kR, Temperature Coefficient=200ppm/°C, Tolerance=5%, Voltage Rating=150V, Case/Package=0805, Composition="Thick Film", Contact Plating=Tin, Depth=1.25mm, Height=0.45mm, Lead Free="Lead Free", Length=2mm, Military Standard=Not, Mount="Surface Mount", Packaging="Tape and Reel", Radiation Hardening=No, Termination=SMD/SMT, Voltage Rating (DC)=150V, Weight=0.000194oz, Width=1.25mm
U1: library part CMP-0093-00173-2, "8-bit AVR Microcontroller, 20MHz, 2.7-5.5V, 8K Flash, 512 Bytes EEPROM, 512 Bytes SRAM, Industrial Grade (-40°C to 85°C), 8-Lead SOIC, Pb-Free", ComponentLink1Description="Manufacturer URL", ComponentLink1URL=http://www.atmel.com/, ComponentLink2Description="ATtiny25/45/85 Datasheet", ComponentLink2URL=http://www.atmel.com/dyn/resources/prod_documents/doc2586.pdf, ComponentLink3Description="ATtiny25/45/85 Summary", ComponentLink3URL=http://www.atmel.com/dyn/resources/prod_documents/2586S.pdf, DatasheetVersion="revN, Apr-2011", PackageDescription="8-Lead, 0.208\" Body, Plastic Small Outline Package (EIAJ)", PackageReference=8S2, PackageVersion="revF, Apr-2008", RevisionNote="DatasheetVersion updated. URLs added."
U2: library part CMP-07128-000001-1, "IC REG LINEAR 3.3V 300MA 5TSOP", Dropout Voltage=150mV, Manufacturer="ON Semiconductor", Max Junction Temp=+150°C, Max Supply Voltage=5.5V, Min Supply Voltage=1.7V, Nominal Supply Current=50uA, Output Current=300mA, Output Voltage=3.3V, Package=483, Temperature="to +150°C", Accuracy Percentage=1%, Automotive=No, Category=IC, ComponentLink2Description=Datasheet, ComponentLink2URL=https://www.onsemi.com/pub/Collateral/NCP114-D.PDF, Device Class L1="Integrated Circuits (ICs)", Device Class L2="Power Management ICs", Device Class L3="Voltage Regulators - Linear", Digikey Description="IC REG LINEAR 3.3V 300MA 5TSOP", Footprint Url=https://www.onsemi.com/pub/Collateral/483.PDF, Height=1.1mm, Lead Free=Yes, Manufacturer Part Number=NCP114ASN330T1G, Number Of Outputs=1, Octopart=https://octopart.com/ncp114asn330t1g-on+semiconductor-74628742, Output Type=Fixed, RoHS=TRUE, Standoff Height=0.01mm, Temperature Range High=+150°C
U3: library part CMP-0859-00113-4, "IC GATE NAND 1CH 2-INP SOT23-5", Ambient Temperature Range High=+125°C, Ambient Temperature Range Low=-40°C, Frequency=100MHz, Manufacturer="Texas Instruments", Max Supply Voltage=5.5V, Min Supply Voltage=1.65V, Nominal Supply Current=10uA, Package=DBV0005A, Temperature="-40°C to +125°C", Automotive=No, Category=IC, ComponentLink2Description=Datasheet, ComponentLink2URL=http://www.ti.com/lit/ds/symlink/sn74lvc1g00.pdf, Device Class L1="Integrated Circuits (ICs)", Device Class L2="Logic ICs", Device Class L3="Logic Gates", Digikey Description="IC GATE NAND 1CH 2-INP SOT23-5", Height=1.45mm, Ipc Land Pattern Name=SOT95P280X145-5, Lead Free=Yes, Logic Function Desc=Inverting, Manufacturer Part Number=SN74LVC1G00DBVR, Mouser Description="IC Mos 74LVC1G00/SO/SN74LVC1G00DBVR TEXAS INSTRUMENT RoHS LVC SOt23", Number Of Circuits=1, Number Of Inputs=2, Number Of Outputs=1, Octopart=https://octopart.com/sn74lvc1g00dbvr-texas+instruments-465560, Propagation Delay=4.3ns, RoHS=TRUE, Standoff Height=0mm, Temperature Range High=+125°C, Temperature Range Low=-40°C
U4: library part CMP-1595-00002-2, "16-Channel, 12-Bit PWM Fm+ I2C-Bus LED Controller, 2.3 to 5.5 V, -40 to 85 degC, 28-Pin TSSOP (SOT361-1), RoHS, Tape and Reel", Frequency="25000000 Hz", PartNumber=PCA9685, Supply Current Max="10 mA", Supply Voltage Max="5.5 V", Supply Voltage Min="2.3 V", Temperature Max="85 degC", Temperature Min="-40 degC", Code_JEDEC=MO-153, ComponentLink1Description="Manufacturer URL", ComponentLink1URL=http://www.nxp.com/, ComponentLink2Description=Datasheet, ComponentLink2URL=http://www.nxp.com/documents/data_sheet/PCA9685.pdf, ComponentLink3Description="Package Specification", ComponentLink3URL=http://www.nxp.com/documents/outline_drawing/sot361-1_po.pdf, DatasheetVersion="Rev. 4", Mounting Technology="Surface Mount", PackageDescription="28-Pin Small Outline Package, Body 9.7 x 4.4 mm, Pitch 0.65 mm", PackageVersion=02/2003, Packing="Tape and Reel", RoHS=TRUE
U5: library part CMP-2000-05068-1, "The Versatile Fiber Optic Connection, 5 MBd, -40 to 85 degC, 4-Pin, RoHS, Rail/Tube", Manufacturer=Broadcom, Maximum Operating Supply Voltage=7V, Maximum Operating Temperature=85C, Maximum Output Current=25mA, Maximum Power Dissipation=40mW, Minimum Operating Supply Voltage=-0.5V, Minimum Operating Temperature=-40C, Typical Operating Supply Voltage=1.8V, Connector Type=Round, Datasheet URL=http://docs.avagotech.com/docs/AV02-1501EN, Datasheet Version=Sep-14, Family=HFBR-2521, Manufacturer URL=http://www.broadcom.com/, Maximum Data Rate=5MBd, Mounting=ThroughHole, Package URL=http://docs.avagotech.com/docs/AV02-1501EN, Peak Wavelength=600nm, Pin_Count=6, Product Height=7.6mm, Product Length=18.8mm, Product Type=OpticalFiber, Product Width=12.2mm, Type=RX
U6: library part CMP-2000-06401-1, "The Versatile Fiber Optic Connection, 5 V, -40 to 85 degC, 6-Pin THD, RoHS, Tube", Capacitance=86pF, Current - DC Forward (If) (Max)=80mA, Manufacturer=Avago, Package Description="6-Pin Through Hole Device, Body 18.8 x 12.19 mm, Pitch 2.54 mm", Package Reference=HFBR-15X2Z, Standard Package=200, Voltage - DC Reverse (Vr) (Max)=5V, Voltage - Forward (Vf) (Typ)=2.02V, Category=Optoelectronics, Connector Type=VersatileLink, Datasheet URL=http://www.avagotech.com/docs/AV02-1501EN, Datasheet Version=09/2014, Family=FiberOptics-Transmitters-Discrete, Manufacturer URL=http://www.avagotech.com/, Mounting Technology=ThroughHole, Online Catalog=HFBR-15xxZ, Other Names=516-2044HFBR1522Z, PCN Design/Specification=Mold/Design29/Jul/2011Lead-FrameUpdates09/Jun/2015Lead-FrameUpdate09/Jun/2015, Series=-, Spectral Bandwidth=-, Wavelength=660nm
Y1: library part CMP-27762-000003-1, "CRYSTAL 16.0000MHZ 18PF SMD", Frequency=16MHz, Load Capacitance=18pF, Manufacturer=Abracon, Package=ABLS, Temperature="-40°C to +125°C", Temperature Range High=+125°C, Temperature Range Low=-40°C, Tolerance=30ppm, Automotive=No, Category=Crys, ComponentLink2Description=Datasheet, ComponentLink2URL=https://abracon.com/Resonators/abls.pdf, Device Class L1="Passive Components", Device Class L2="Crystals / Oscillators", Device Class L3=Crystals, Digikey Description="CRYSTAL 16.0000MHZ 18PF SMD", Esr=40Ω, Height=4.3mm, Lead Free=Yes, Manufacturer Part Number=ABLS-16.000MHZ-K4T, Mouser Description="Crystal 16MHz ±30ppm (Tol) ±50ppm (Stability) 18pF FUND 40Ohm 2-Pin HC-49/US SMD T/R", Octopart=https://octopart.com/abls-16.000mhz-k4t-abracon-18618626, RoHS=TRUE, Series=ABLS, Stability=50ppm, Standoff Height=0mm

## Via types
v1: diameter 50, hole 28, Top Layer to Bottom Layer, 23 vias

## Nets (pads, with @x,y where several pads share a name; then routed paths per layer and width w, separated by ;. In a path a pad name is that pad's centre, name@x,y a point inside that pad or via, vN(x,y) a via of type N, cw(c..) or ccw(c..) an arc to the next point about the centre after c; other vN are vias at no path point)
3V3: C4.1 C5.2 C6.2 C7.2 P1.2 R1.2 R5.2 R6.2 R7.2 R9.2 R10.2 R11.2 R12.2 R13.2 U1.8 U2.5 U3.1 U3.5 U4.28 U5.3 | length 2549.4
  Top Layer w10: U2.5@3910,3694.84 U2.5 ; v1(3910,3750) 3910,3760.82 3925,3775.82 R5.2 ; U1.8 4325,3510 v1(4350,3535) ; v1(4730,4125) 4730,4114.18 4748.58,4095.59 4748.58,3992.09 4755.39,3985.28 U4.28 ; v1(5030,3755) 5092.6,3692.4 U3.5 ; R9.2 5182,3499.88 5192.87,3510.75 5239.93,3510.75 5249.18,3520 v1(5260,3520)
  Top Layer w30: U2.5@3910,3694.84 v1(3910,3750)
  Bottom Layer w10: v1(3910,3750) 3920.82,3750 3940.82,3730 R1.2 ; R11.2 3988.5,3113.5 R10.2 v1(3990,3190) ; 4336.02,3287.44 4344.88,3287.44 4358.58,3301.14 C4.1 4350,3318.58 v1(4350,3535) ; R13.2 4358.97,4084.53 R12.2 ; R7.2 4621.1,3765.55 R6.2 4621.1,3875.91 4691.42,3946.22 C7.2 4691.42,4008.86 4730,4047.44 v1(4730,4125) ; v1(5030,3755) C5.2 ; C6.2@5200.47,3195 C6.2 5205.47,3123.82 U5.3 U5.3@5268.58,3068.57
  Bottom Layer w15: R13.2 4358.5,4083.38 4366.87,4075 4452.14,4075 4502.14,4125 v1(4730,4125)
GND: C1.2 C2.1 C3.1 C4.2 C5.1 C6.1 C7.1 J1.A1 J1.A12 LED1.1 P1.6 Q1.2 Q2.2 R2.2 R3.1 R4.2 R8.1 U1.4 U2.2 U2.4 U3.3 U4.1 U4.2 U4.3 U4.4 U4.5 U4.14 U4.24 U4.25 U5.2 U6.2 | length 3969.4
  Top Layer w10: J1.A12 3812.29,3361.89 3824.18,3350 v1(3835,3350) ; J1.A1 3766.3,3598.11 3835,3666.81 3835,3723.43 3810,3748.43 v1(3810,3755) 3810,3897.52 LED1.1 ; U2.2 3950,3648.94 3987.4,3686.34 U2.4 3991.34,3688.31 Q1.2 4082.6,3779.92 R3.1 4060.79,3801.73 4060.79,3874.21 v1(4060,3875) 4070.82,3875 4092,3853.82 4251.18,3853.82 R4.2 ; U1.4 4479.17,3165 v1(4570,3165) ; U4.14 4619.72,3644.72 v1(4650,3675) 4650,3783.11 ; U4.1 U4.2 U4.3 U4.4 U4.5 4541.92,3876.9 4583.1,3876.9 4650,3810 4650,3783.11 ; R8.1 4879.06,3756.37 4846.39,3789.04 4846.39,3846.88 4846.74,3847.23 4846.74,3855.51 4823.28,3878.98 U4.24 U4.25 4751.46,3904.57 4748.58,3901.69 4748.58,3881.69 4650,3783.11 ; Q2.2 5012.32,3542.5 5012.32,3597.32 v1(5014.63,3599.63) 5019.26,3595 5075,3595 5097.6,3617.6 U3.3
  Bottom Layer w10: v1(3810,3755) 3865,3700 3931.42,3700 3963.86,3667.56 3972.72,3667.56 3986.42,3653.86 C1.2 ; v1(3835,3350) 3887.68,3350 3931.06,3306.61 R2.2 ; v1(4060,3875) 4299.74,3875 4364.74,3940 4440,3940 4500,4000 C7.1 ; v1(4410.83,3020) 4406.65,3020 4339.53,2952.87 C3.1 4465.47,2945 C2.1 ; C4.2 4431.42,3301.14 4567.56,3165 v1(4570,3165) ; C5.1 5186.42,3812.13 U6.2 ; C6.1 5264.53,3192.13 5315.47,3141.18 5329.53,3141.18 U5.2
MISO: P1.1 U1.6 U3.2 | length 995
  Top Layer w10: U1.6 4425,3405.39 4500.39,3330 P1.1 ; v1(4865,3450) 4913.83,3498.83 4913.83,3608.83 4960,3655 U3.2
  Bottom Layer w10: P1.1 4805.51,3355.51 4805.51,3390.51 v1(4865,3450)
MOSI: P1.4 R6.1 U1.5 U4.27 | length 2038.6
  Top Layer w10: U1.5 4714.17,3440.83 4755,3400 4945,3400 4960,3385 4960,3275.86 4941.95,3257.81 4916.55,3257.81 4888.74,3230 P1.4 ; U4.27 4772.28,3957.87 4982.87,3957.87 v1(4985,3960)
  Bottom Layer w10: R6.1 4781.86,3870 4871.86,3960 v1(4985,3960) 4955,3930 4955,3380 4935,3360 4935,3285 P1.4
NetC1_1: C1.1 D1.1 J1.A4 U2.1 | length 481.8
  Top Layer w10: D1.1@3997.72,3524.02 4010.63,3511.1 D1.1
  Top Layer w15: J1.A4 3819.06,3539.06 v1(3840,3560) 3880.75,3560 3912.6,3591.85 3912.6,3537.4 3945,3505 D1.1
  Bottom Layer w10: v1(3840,3560) 3840,3562.56 3913.58,3636.14 C1.1
NetC2_2: C2.2 U1.3 Y1.2 | length 462.8
  Top Layer w10: U1.3@4425,3133.74 U1.3
  Top Layer w15: U1.3@4425,3133.74 4588.3,2970.44 4588.3,2956.7 4595,2950 4595,2851.54 Y1.2
  Bottom Layer w10: C2.2 v1(4595,2940)
NetC3_2: C3.2 U1.2 Y1.1 | length 444.9
  Top Layer w10: U1.2@4375,3133.74 U1.2
  Top Layer w15: Y1.1 4225,2847.52 v1(4225,2950) 4231.7,2956.7 4231.7,2990.44 U1.2@4375,3133.74
  Bottom Layer w10: v1(4225,2950) 4275.47,2950 C3.2
NetD1_2: D1.2 R4.1 | length 282
  Top Layer w10: D1.2@4138.3,3506.07 4265,3632.78 R4.1
NetD3_1: D3.1 U4.11 | length 986.5
  Top Layer w10: D3.1 4034.72,3029.57 4102.01,3096.85 4102.01,3252.01 4218.71,3368.71 4218.71,3506.29 4437.86,3725.43 U4.11
NetD3_2: D3.2 U4.10 | length 974.1
  Top Layer w10: D3.2 4034.72,3065 4087.01,3117.28 4087.01,3258.22 4200.61,3371.82 4200.61,3509.39 4442.24,3751.02 U4.10
NetD3_3: D3.3 U4.9 | length 957.3
  Top Layer w10: D3.3 4027.21,3100.43 4032.06,3105.28 4032.06,3119.42 4072.01,3159.37 4072.01,3264.43 4185,3377.43 4185,3515 4446.61,3776.61 U4.9
NetD3_4: D3.4 D3.5 D3.6 R10.1 R11.1 | length 390.6
  Top Layer w10: v1(3810,3065) D3.5 ; D3.6 D3.5 ; D3.4 D3.5
  Bottom Layer w10: v1(3810,3065) 3860,3015 R11.1 3921.5,3113.5 R10.1
NetD4_1: D4.1 U4.8 | length 287
  Top Layer w10: D4.1 4402.21,4004.57 4407.06,3999.72 4407.06,3985.58 4445.07,3947.57 4445.07,3873.98 4513.97,3805.08 4536.97,3805.08 U4.8
NetD4_2: D4.2 U4.7 | length 301.2
  Top Layer w10: D4.2 4409.72,4040 4460.07,3989.65 4460.07,3884.57 4513.97,3830.67 4536.97,3830.67 U4.7
NetD4_3: D4.3 U4.6 | length 311.1
  Top Layer w10: D4.3 4409.72,4075.43 4475.07,4010.09 4475.07,3895.16 4513.97,3856.26 4536.97,3856.26 U4.6
NetD4_4: D4.4 D4.5 D4.6 R12.1 R13.1 | length 354
  Top Layer w10: v1(4195,4040) D4.5 ; D4.6 D4.5 ; D4.4 D4.5
  Bottom Layer w10: v1(4195,4040) 4246.5,4040 4270.75,4064.25 4280.63,4064.25 R13.1@4291.5,4075.12 ; R13.1 R13.1@4291.5,4075.12 ; R12.1 4291.5,3990.47 R13.1@4291.5,4075.12
NetJ1_A5: J1.A5 R2.1 | length 235.2
  Top Layer w10: J1.A5 3759.33,3518.46 3786.54,3518.46 v1(3830,3475)
  Bottom Layer w10: v1@3828.39,3473.39 v1(3830,3475) 3839.45,3475 3931.06,3383.39 R2.1
NetLED1_2: LED1.2 R5.1 | length 117.8
  Top Layer w10: LED1.2 3900.23,3985.2 3919.06,3966.37 R5.1
NetQ1_1: Q1.1 R3.2 | length 109.9
  Top Layer w10: R3.2 4137.48,3712.17 4157.4,3692.24 Q1.1
NetQ1_3: Q1.3 R1.1 U2.3 | length 288.4
  Top Layer w10: U2.3 4116.06,3597.76 Q1.3
  Bottom Layer w10: v1(4060,3600) 4118.46,3658.46 R1.1
NetQ2_1: Q2.1 U3.4 | length 218.4
  Top Layer w10: Q2.1 5103.14,3540.49 5180.25,3617.6 U3.4
NetQ2_3: Q2.3 R9.1 U6.1 | length 716.5
  Top Layer w10: Q2.3 5114.51,3489.51 R9.1 5115,3499.88 5190.12,3575 5240.01,3575 5267.83,3602.82 5267.83,3787.17 5190,3865 5190,3921.05 5217.87,3948.92 U6.1
NetR8_2: R8.2 U4.23 | length 249.2
  Top Layer w10: U4.23 4773.03,3850.51 4800.19,3850.51 4800.7,3850 4805,3850 4820,3835 4820,3750 4820.68,3749.32 4820.68,3737.95 4860.31,3698.32 4860.31,3692.38 4879.06,3673.63 R8.2
RST: P1.5 U1.1 U5.1 U5.4 | length 1365
  Top Layer w10: U1.1 4325,3204.61 4348.78,3228.39 4681.61,3228.39 P1.5 4920,2990 U5.4
  Bottom Layer w10: U5.4 5280,2990 5405,3115 5405,3197.13 U5.1
SCK: P1.3 R7.1 U1.7 U4.26 | length 1698.3
  Top Layer w10: U1.7 4375,3405.39 4465.39,3315 4695,3315 P1.3 ; U4.26 4859.02,3930.16 4873.39,3915.78 v1(4884.22,3915.78)
  Bottom Layer w10: R7.1 4765,3765 4821.17,3821.17 4821.17,3851.17 v1@4884.22,3914.22 ; P1.3 4705,3305 4705,3395 4884.22,3574.22 v1@4884.22,3914.22 ; v1(4884.22,3915.78) v1@4884.22,3914.22
pads on no net: J1.1 J1.2 J1.3 J1.4 J1.A2 J1.A3 J1.A6 J1.A7 J1.A8 J1.A9 J1.A10 J1.A11 J1.B1 J1.B2 J1.B3 J1.B4 J1.B5 J1.B6 J1.B7 J1.B8 J1.B9 J1.B10 J1.B11 J1.B12 U4.12 U4.13 U4.15 U4.16 U4.17 U4.18 U4.19 U4.20 U4.21 U4.22 U5.5 U5.8 U6.3 U6.4 U6.5 U6.8

## Polygon pours and split planes (outlines as drawn)
GND on Int1 (GND) (split plane): 5490,4252.05 5501.62,4252.05 5687.05,4066.62 5687.05,2928.38 5483.75,2725.08 3610.04,2725.08 3601.58,2725.08 3600.83,2725.26 3600.36,2725.28 3599.9,2725.37 3591.33,2726.14 3575.07,2729.5 3559.45,2734.82 3544.61,2742.03 3530.78,2751.03 3518.17,2761.67 3506.98,2773.79 3497.37,2787.2 3489.51,2801.7 3483.5,2817.07 3479.44,2833.06 3477.39,2849.43 3477.39,2857.68 3477.39,2857.7 3477.39,2857.72 3475.17,4111.18 3475.17,4120.39 3477.58,4138.7 3482.36,4156.54 3489.43,4173.6 3498.67,4189.6 3509.91,4204.25 3522.97,4217.31 3537.62,4228.56 3553.62,4237.79 3570.68,4244.86 3588.52,4249.64 3606.84,4252.05 3616.07,4252.05
3V3 on Int2 (PWR) (split plane): 5490,4252.05 5501.62,4252.05 5687.05,4066.62 5687.05,2928.38 5483.75,2725.08 3610.04,2725.08 3601.58,2725.08 3600.83,2725.26 3600.36,2725.28 3599.9,2725.37 3591.33,2726.14 3575.07,2729.5 3559.45,2734.82 3544.61,2742.03 3530.78,2751.03 3518.17,2761.67 3506.98,2773.79 3497.37,2787.2 3489.51,2801.7 3483.5,2817.07 3479.44,2833.06 3477.39,2849.43 3477.39,2857.68 3477.39,2857.7 3477.39,2857.72 3475.17,4111.18 3475.17,4120.39 3477.58,4138.7 3482.36,4156.54 3489.43,4173.6 3498.67,4189.6 3509.91,4204.25 3522.97,4217.31 3537.62,4228.56 3553.62,4237.79 3570.68,4244.86 3588.52,4249.64 3606.84,4252.05 3616.07,4252.05

## Keep-outs
Keep-Out Layer:
  circle w10: c3655,4070 r80
  circle w10: c5500,3475 r80
  circle w10: c3650,2900 r80
  pour cut-out: 3570,2900 ccw(c3650,2900) 3650,2820 ccw(c3650,2900) 3730,2900 ccw(c3650,2900) 3650,2980 ccw(c3650,2900)
  lines w10: 3600,2710 5490,2710 5700,2920 ; 3610,2710 cw(c3610,2857.69) 3462.31,2857.69 3460.09,4111.15 cw(c3616.07,4111.15) 3616.07,4267.13 5490,4267.13 5507.87,4267.13 5702.5,4072.5 ; 5702.13,2920 5702.13,4072.5

## Silkscreen, mask and mechanical layers (free items; w line width, h text height)
Top Overlay:
  text "TX" at 5070,4155 h60
  text "RX" at 5125,2780 h60
Bottom Overlay:
  drawing of 3 lines, arcs and shapes, not listed
  text "Rev 1.0.0" at 5375,2855 h60
  text "2.26.21" at 5255,2750 h60